# Allegro board NE555_2303.brd
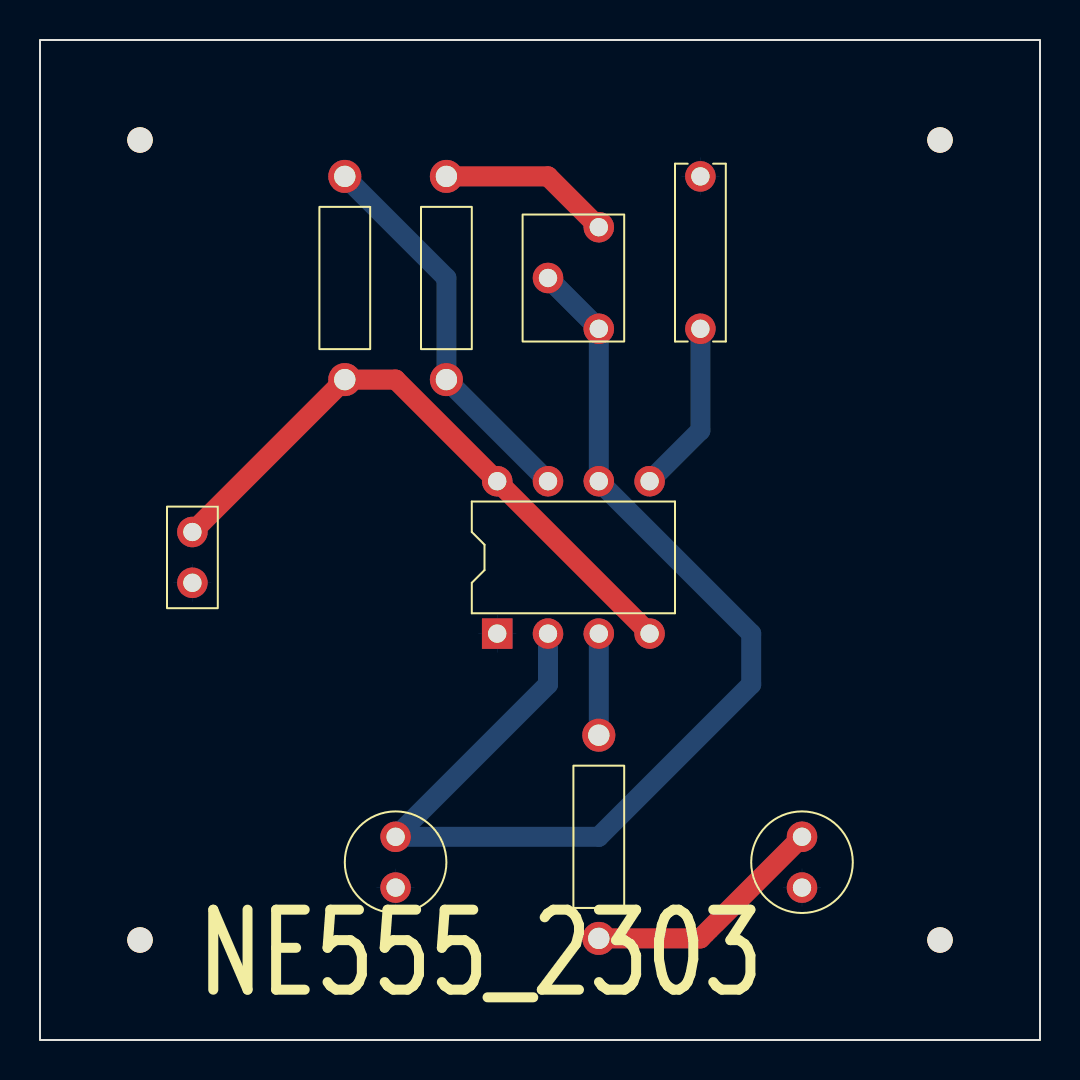
[diagram p0: board, top side]
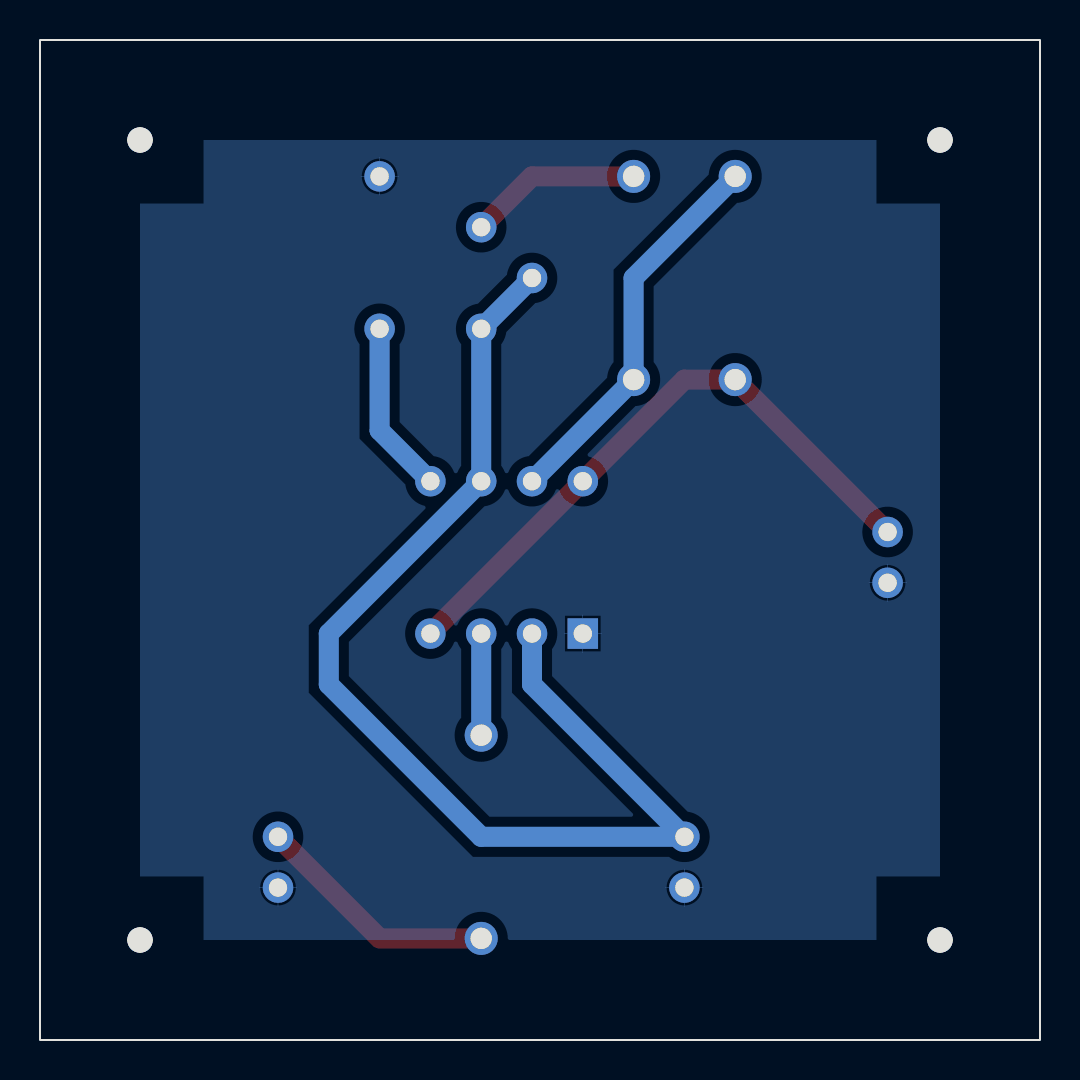
[diagram p1: board, bottom side, seen from below]

Outline 50 x 50 mm; copper layers: TOP, BOTTOM. Coordinates in mm from the lower left corner of the outline.
Outline path: rectangle 0,0 50,50

## Placement (name value [footprint] x y rotation side)
C1  10uF  [CAP196]  17.78 10.16 180 top
C2  0.1uF  [CAP300]  33.02 35.56 90 top
D1  LED  [CAP196]  38.1 7.62 0 top
J1  CON2  [JUMPER2]  7.62 25.4 270 top
NOREF  -  []  45 51 0 top
NOREF#2  -  []  0 51 0 top
NOREF#3  -  []  0 50 0 top
NOREF#4  -  []  -1 0 90 top
NOREF#5  -  [unnamed#2]  5 45 0 top
NOREF#6  -  [unnamed#2]  45 45 0 top
NOREF#7  -  [unnamed#2]  45 5 0 top
NOREF#8  -  []  -1 45 90 top
NOREF#9  -  []  0 0 90 top
NOREF#10  -  [unnamed#2]  5 5 0 top
R1  560  [RES400]  15.24 33.02 0 top
R2  1k  [RES400]  20.32 33.02 0 top
R3  100k  [RESADJ]  27.94 40.64 0 top
R4  220  [RES400]  27.94 15.24 180 top
U1  NE555  [DIP8_3]  22.86 20.32 90 top

## Library data of the parts
C1 = CAP POL: Tolerance: ***; User Part Number: ***
C2 = CAP NP: Tolerance: ***; User Part Number: ***
D1 = LED_1: Tolerance: ***; User Part Number: ***
J1 = CON2: User Part Number: ***
R1 R2 R4 = RESISTOR: Tolerance: ***; User Part Number: ***
R3 = RESISTOR VAR: Tolerance: ***; User Part Number: ***
U1 = NE555_0: Tolerance: ***; User Part Number: ***

## Footprints (pads in the part's own frame, mm; a bottom-side part is the same pattern mirrored in y, then rotated)
CAP196
  round 1.524 hole 0.914: 1(0,0) 2(0,2.54)
CAP300
  round 1.524 hole 0.914: 1(0,0) 2(7.62,0)
DIP8_3
  rect 1.524x1.524 hole 0.914: 1(0,0)
  round 1.524 hole 0.914: 2(0,-2.54) 3(0,-5.08) 4(0,-7.62) 5(7.62,-7.62) 6(7.62,-5.08) 7(7.62,-2.54) 8(7.62,0)
JUMPER2
  round 1.524 hole 0.914: 1(0,0) 2(2.54,0)
RES400
  round 1.651 hole 1.067: 1(0,0) 2(0,10.16)
RESADJ
  round 1.524 hole 0.914: 1(0,0) 2(-2.54,-2.54) 3(0,-5.08)
unnamed#2
  round 1.27 hole 3 unplated: (0,0)

## Nets
GND: C1.2 C2.2 D1.1(CATHODE) J1.2 U1.1
VCC: J1.1 R1.1 U1.4(RST) U1.8(VCC)
N00329: R2.2 R3.1(A)
N00333: R1.2 R2.1 U1.7(DSCHG)
N00462: C1.1 R3.2(WIPER) R3.3(B) U1.2(TRG) U1.6(THR)
N00675: C2.1 U1.5(CV)
N00682: R4.1 U1.3(OUT)
N00697: D1.2(ANODE) R4.2

## Routing (per net, layer and track width the routed paths; a pad name or vN(x,y) marks a point on that pad's centre or on a via; arc(x,y) is an arc through that point)
GND: length 18.8
  BOTTOM w0.013: 6.68,22.86 J1.2 ; J1.2 8.56,22.86 ; J1.2 7.62,23.8 ; J1.2 7.62,21.92 ; 16.84,7.62 C1.2 ; C1.2 17.78,6.68 ; C1.2 17.78,8.56 ; C1.2 18.72,7.62 ; 22.86,19.38 U1.1 ; U1.1 23.8,20.32 ; U1.1 22.86,21.26 ; U1.1 21.92,20.32 ; 37.16,7.62 D1.1 ; D1.1 39.04,7.62 ; D1.1 38.1,6.68 ; D1.1 38.1,8.56 ; C2.2 33.96,43.18 ; C2.2 33.02,42.24 ; C2.2 33.02,44.12 ; C2.2 32.08,43.18
VCC: length 31.3
  TOP w1: J1.1 R1.1 17.78,33.02 U1.8 U1.4
N00329: length 8.7
  TOP w1: R2.2 25.4,43.18 R3.1
N00333: length 19.4
  BOTTOM w1: U1.7 R2.1 20.32,38.1 R1.2
N00462: length 58.8
  BOTTOM w1: R3.2 R3.3 U1.6 35.56,20.32 35.56,17.78 27.94,10.16 C1.1 25.4,17.78 U1.2
N00675: length 8.7
  BOTTOM w1: U1.5 33.02,30.48 C2.1
N00682: length 5.1
  BOTTOM w1: U1.3 R4.1
N00697: length 12.3
  TOP w1: R4.2 33.02,5.08 D1.2

## Copper pours and planes (outline as drawn; the poured copper is in the pictures)
GND on BOTTOM: 45,5 5,5 5,45 45,45

## Text on the board
Ref Des/Silkscreen Top: NE555_2303
DIMENSION: FIGURE | SIZE | 0.914 | 1.067 | 3.0 | DRILL CHART: TOP to BOTTOM | ALL UNITS ARE IN MILLIMETERS | PLATED | NON-PLATED | QTY | 19 | 6 | 4
